# Altium PCB ESP32-PCB.PcbDoc (part 2 of 3)
Units mil, origin at the board's own origin, x right, y up, seen from the top; angles counter-clockwise.
Board outline 2800 x 1000 mil, 4 copper layers (L1, L2, L3, L4), stack 61.094 mil thick; 64 components, 76 nets, 301 pads, 135 vias.
Unrouted connection lines stored in the file: 2.
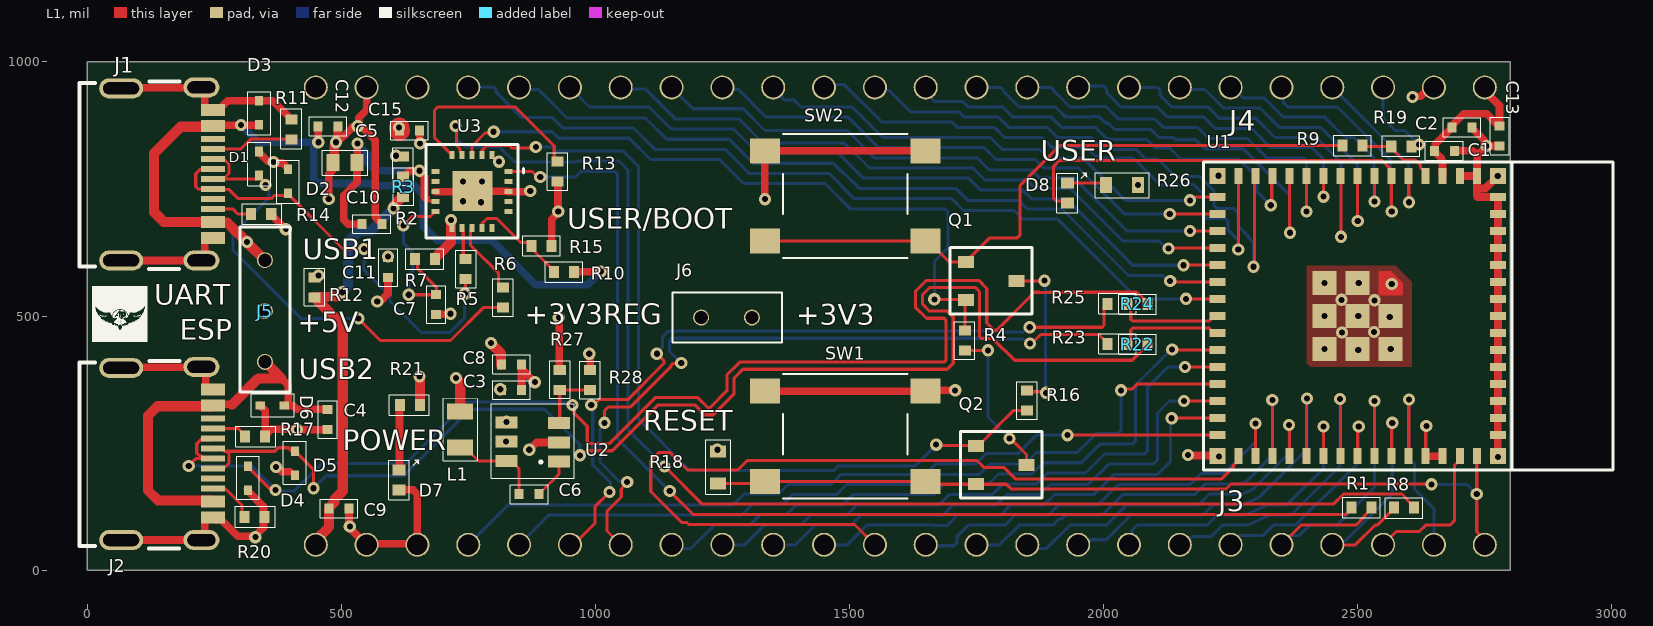
[diagram p0: L1 view]

## Part data (continued)
U1: library part ESP32-S3-MINI-1U-N8_1, LCSC PART NUMBER=C2980299, Manufacturer="Espressif Systems", Supplier Part Number=356-ESP32S3MINI1UN8, Category=LDO, Manufacturer Part Number=ESP32-S3-MINI-1U-N8, Pricing="1=3.1, 10=3.1, 50=3.1, 100=3.1, 1000=3.1, 10000=3.1 (USD)", RoHS=No, Stock=4263, Supplier=Mouser
U2: "Switching Regulator, Current-mode, 1A, 2100kHz Switching Freq-Max, PDSO6", LCSC PART NUMBER=C5219374, Manufacturer="Texas Instruments", Category="Voltage Regulators - Switching", Manufacturer Part Number=LMR50410Y3FQDBVRQ1, Pricing="1=0.927, 10=0.8198, 30=0.7189, 100=0.6432, 500=0.6117, 1000=0.5975 (USD)", RoHS=Yes, Stock=165, Supplier=LCSC, Supplier Part Number=C5219374
U3: "Microprocessor Circuit, CMOS", Case/Package=HVQCCN, LCSC PART NUMBER=C132159, Manufacturer=FTDI, Max Operating Temperature=85°C, Max Supply Current=8.4mA, Max Supply Voltage=5.5V, Min Operating Temperature=-40°C, Min Supply Voltage=2.97V, Nominal Supply Voltage=5V, Package Shape=Square, Package Style="CHIP CARRIER, HEAT SINK/SLUG, VERY THIN PROFILEMeter", Power Supplies=3.3/5V, Supplier Part Number=7570045P, Temperature Grade=INDUSTRIAL, Category="Interface ICs", ComponentLink1Description=https://datasheet.ciiva.com:443/pdfs/VipMasterIC/IC/FTDI/FTDIS00099/FTDIS00099-1.pdf?src-supplier=IHS+Markit, ComponentLink1URL=https://datasheet.ciiva.com:443/pdfs/VipMasterIC/IC/FTDI/FTDIS00099/FTDIS00099-1.pdf?src-supplier=IHS+Markit, ComponentLink2Description=https://datasheet.ciiva.com/1787/ds-ft231x-1787312.pdf?src-supplier=Digikey, ComponentLink2URL=https://datasheet.ciiva.com/1787/ds-ft231x-1787312.pdf?src-supplier=Digikey, ComponentLink3Description=https://datasheet.ciiva.com/4787/ds-ft231x-13571-4787570.pdf?src-supplier=Mouser, ComponentLink3URL=https://datasheet.ciiva.com/4787/ds-ft231x-13571-4787570.pdf?src-supplier=Mouser, ComponentLink4Description=https://datasheet.ciiva.com/30475/0900766b811020d3-30475405.pdf?src-supplier=Rs, ComponentLink4URL=https://datasheet.ciiva.com/30475/0900766b811020d3-30475405.pdf?src-supplier=Rs, ComponentLink5Description=https://datasheet.ciiva.com/1787/ft-x-series-1787313.pdf?src-supplier=Digikey, ComponentLink5URL=https://datasheet.ciiva.com/1787/ft-x-series-1787313.pdf?src-supplier=Digikey, ComponentLink6Description=https://datasheet.ciiva.com/1787/ft-x-series-1787314.pdf?src-supplier=Digikey, ComponentLink6URL=https://datasheet.ciiva.com/1787/ft-x-series-1787314.pdf?src-supplier=Digikey, Height - Seated (Max)=0.8mm, JESD-30 Code=S-XQCC-N20, Length=4mm, Manufacturer Part Number=FT231XQ-R, Pins=20, Pricing="10=1.655, 40=1.535, 100=1.485, 200=1.455 (GBP)", Qualification Status="Not Qualified", Reach SVHC Compliant=Yes, RoHS=Yes, RoHS Compliant=Yes, Stock=17616, Supplier=Rs, Surface Mount=Yes, Technology=CMOS, Terminal Form="No Lead", Terminal Pitch=0.5mm, Terminal Position=QUAD, Width=4mm

## Via types
v1: diameter 24, hole 12, L1 to L4, tented both sides, 135 vias

## Nets (pads, with @x,y where several pads share a name; then routed paths per layer and width w, separated by ;. In a path a pad name is that pad's centre, name@x,y a point inside that pad or via, vN(x,y) a via of type N, cw(c..) or ccw(c..) an arc to the next point about the centre after c; other vN are vias at no path point)
+3V3: C1.2 C2.2 C9.2 C13.2 J3.24 J4.1 J6.2 R3.1 R12.1 R18.2 R26.2 U1.3 | length 4356.7
  L1 w15: J3.24@450,50 J3.24@450,58.73 ; v1(603,712) 604.03,713.03 v1@604.03,718.63 ; R3.1@620.03,734.63 R3.1@622,734.63 ; U1.3@2667.32,775.59 2666.95,775.96 2666.95,804.97 2664.01,807.91 2664.01,811 2651,824.02 2652.36,825.37 2652.36,837.73 2683.29,868.66 2683.29,872.74 2708.89,898.34 2753.67,898.34 2778.02,874 C13.2@2779,874 2779,913.77 2750,942.77 J4.1@2750,950
  L1 w20: J3.24@450,58.73 476,84.73 476,123.19 486.51,133.7 486.51,139.13 503,155.61 503,481 R12.1@447,537 463.57,537 471.21,537.26 494.1,539.1 v1(502,547) ; v1@604.03,718.63 R3.1@620.03,734.63 ; R18.2@1237.06,234 R18.2@1241,234 1244.94,234 R18.2@1246.75,235.81 ; R26.2@2068,754.06 v1(2068,758)
  L1 w40: J4.1@2748.61,948.61 J4.1@2750,950
  L3 w20: v1(2068,758) 2068,878.61 2069,879.61
  L3 w40: J3.24@450,51.96 451.39,53.35 451.39,86.39 519.78,154.78 955.28,154.78 1046.8,246.31 1230.69,246.31 v1(1240,237) 1308.21,305.21 J6.2@1308.21,497.21 1287,518.43 1287,855.17 1310.43,878.61 2068,878.61 ; 2069,879.61 2679.61,879.61 J4.1@2750,950
  L4 w15: J6.2@1308.21,497.21 J6.2@1311.37,500.37
  L4 w20: v1(502,547) 502,548.08 513.14,559.22 513.14,645.11 535.74,667.72 558.72,667.72 v1(603,712)
+3V3_FTDI: C11.2 R7.1 R12.2 U3.10 U3.20 | length 607.2
  L1 w6: U3.20@796.39,816.87 796.39,813.91 806.42,803.88 v1(810.42,803.88)
  L1 w20: R7.1@684.37,612 684.37,613.65 716.17,645.45 v1(716.17,688.8)
  L3 w6: v1(716.17,688.8) 716.17,770.87 749.18,803.88 v1(810.42,803.88)
  L3 w40: v1(455.2,579.8) 465.24,589.83 564.83,589.83 611.43,636.43 639.63,636.43 691.99,688.8 v1(716.17,688.8)
  other v1: 592,617
+3V3_REG: C8.2 J6.1 L1.2 R21.1 R27.2 | length 888.7
  L1 w15: C8.2@814.63,404 C8.2@815.63,405 ; R27.2@928.03,394.37 R27.2@930,394.37 929.11,395.26 929.11,496.32 v1(928.21,497.21)
  L1 w20: v1(654,381) 654,379.92 655,378.92 R21.1@655,325 ; v1(726,378) 726,376.92 734.09,368.82 L1.2@734.09,312.01 ; v1(795,447) 795,445.92 814.63,426.29 C8.2@814.63,404
  L3 w40: v1(654,381) 657,378 v1(726,378) v1(795,447) 878,447 v1(928.21,497.21) J6.1@1208.21,497.21
+5V: C3.1 C15.2 J4.22 J5.2 R2.1 U2.4 U2.5 | length 1271.2
  L1 w15: U2.4@815,295.1 819.31,290.79 U2.4@825,290.79
  L1 w40: v1(614,871) 614,866 C15.2@615,865
  L3 w40: v1(608,815.5) 608,803.3 350,545.3 J5.2@350,510 607,253 v1(824,253) 825,254 825,344 v1(813,356) ; v1@613.37,813.37 613.37,870.37 v1(614,871) 614,912.04 650,948.04 J4.22@650,950
  other v1: 825,292
+5V_VBUS1: C12.2 D3.2 J1.A4B9 J1.B4A9 J5.3 R10.2 | length 1628.3
  L1 w15: J1.B4A9@247.44,685.43 J1.B4A9@249.25,683.62 ; J1.A4B9@247.44,874.41 248.5,875.47 303,875.47 337.74,875.47 338.11,875.85 D3.2@338.11,876.54 ; 276.38,683.62 282,678 ; C12.2@454.63,873 454.81,872.81 454.81,842.19 v1(455,842) ; R10.2@958,587 958.5,587.5 1010.5,587.5 v1(1011,588)
  L1 w20: J1.B4A9@247.44,685.43 150.57,685.43 132,704 132,820.61 183.99,872.6 245.63,872.6 J1.A4B9@247.44,874.41 ; J1.B4A9@249.25,683.62 276.38,683.62 ; 282,678 313.93,646.07 v1@314.44,646.07 ; v1(314.44,645.56) J5.3@350,610
  L4 w15: v1(303,876) 337,842 v1(455,842) 455,839.56 446,830.56 446,769.79 454.79,761 557.64,761 559.87,761 564.37,756.5 644.5,756.5 661.72,739.28 661.72,676.28 689,649 796,649 883,562 985,562 v1(1011,588)
+5V_VBUS2: C4.2 D6.2 J2.A4B9 J2.B4A9 J5.1 | length 762.3
  L1 w15: J2.A4B9@247.44,324.41 249.25,326.22 284,326.22 ; 382.5,377.5 395.71,364.29 395.71,324.37 D6.2@395.33,324 ; D6.2@395,324 D6.2@395.33,324 ; C4.2@473,317 412.63,317 406,323.63 395.71,323.63 D6.2@395.33,324
  L1 w20: J2.B4A9@247.44,135.43 245.63,137.24 139.76,137.24 120,157 120,304 138.6,322.6 245.63,322.6 J2.A4B9@247.44,324.41 ; 284,326.22 285.81,326.22 337.09,377.5 382.5,377.5 J5.1@350,410
+VCC_FTDI: C5.2 C10.2 R2.2 R3.2 U3.12 | length 475.2
  L1 w6: 667,731.29 671.78,726.52 U3.12@684.79,726.52
  L1 w15: v1(531.8,839.66) 531.4,839.27 531.4,802.4 C5.2@531,802 531,763.2 505,737.2 505,689.79 513.79,681 C10.2@540.63,681 ; R2.2@619.66,772.29 R2.2@622,774.63 624.6,774.63 626.31,776.34 626.31,776.97 635.27,785.94 653.94,785.94 v1(654,786) 654,783.56 663.79,773.77 663.79,734.5 667,731.29
  L4 w15: v1(531.8,839.66) 531.8,837.23 552.76,816.26 552.76,801.24 568,786 v1(654,786)
BTN_GPIO0: Q1.2 R9.1 SW2.1 | length 1305.5
  L1 w6: SW2.1@1333.46,647.83 SW2.1@1650,647.83 1654.92,647.83 1695.95,606.8 Q1.2@1729,606.8 1776.2,654 1830.14,654 1836,659.86 1836,757.22 1914.78,836 R9.1@2470,836
CHIP_PU: J3.1 Q2.3 R18.1 SW1.1 U1.45 | length 1694.1
  L1 w6: R18.1@1241.39,171.01 1329.47,171.01 SW1.1@1333.46,175 SW1.1@1650,175 1655.8,169.2 Q2.3@1749,169.2 1808.75,169.2 1818.16,159.79 2240.78,159.79 2250.8,169.81 2644.19,169.81 v1(2645,169) ; U1.45@2734.25,224.41 v1(2734.25,150.12) 2734.25,75.83 2750,60.08 J3.1@2750,50
  L4 w6: v1(2645,169) 2714.95,169 2733.83,150.12 v1(2734.25,150.12)
CON1_USB_N: D1.2 J1.A7 J1.B7 R6.1 | length 975.2
  L1 w6: J1.A7@247.44,770.08 272.33,770.08 333.23,770.08 D1.2@338.11,774.96 ; J1.B7@247.44,809.45 250.35,806.54 271.5,806.54 279.06,798.98 279.06,780.54 272.33,773.81 272.33,770.98 ; D1.2@338.11,776.54 D1.2@338.11,774.96 ; v1(351,758.02) 348.32,760.7 348.32,764.75 D1.2@338.11,774.96 ; v1(534,495) 577,452 715,452 779.63,516.63 R6.1@818,516.63
  L4 w6: v1(351,758.02) 351,753.15 358.23,745.93 358.23,733.31 287.44,662.53 287.44,629.08 421.52,495 v1(534,495)
CON1_USB_P: D2.2 J1.A6 J1.B6 R5.1 | length 839.4
  L1 w6: J1.A6@247.44,789.76 246.54,788.86 222.55,788.86 213.82,780.13 213.82,754.73 218.33,750.22 229.9,750.22 230.63,749.49 279.13,749.49 282,746.61 297.59,731.02 362.18,731.02 368.71,737.55 392.13,737.55 D2.2@395,740.43 ; D2.2@395,742 D2.2@395,740.43 ; v1(545.14,631.86) 503.57,631.86 D2.2@395,740.43 ; v1(743,544) 745,546 R5.1@745,572.63
  L4 w6: v1(545.14,631.86) 545.14,590.22 588.68,546.68 596,539.36 596,529 596,528.82 598.03,526.79 656.82,468 714,468 743,497 v1(743,544)